# EAGLE board bc (EAGLE 5.05)
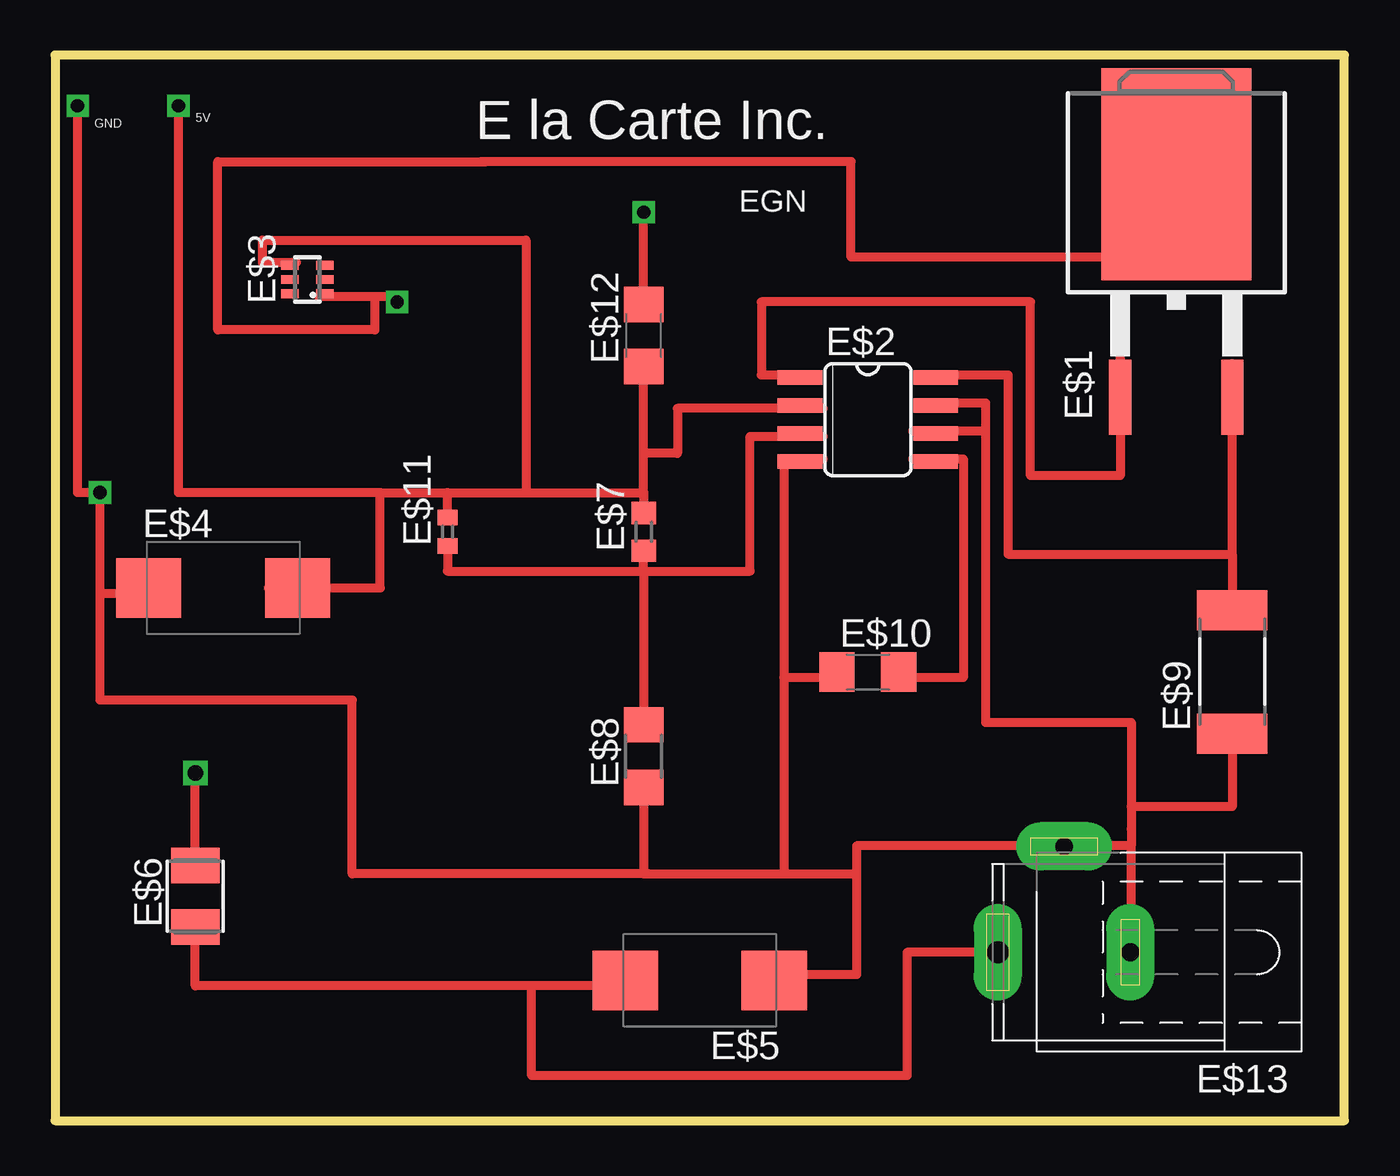
[diagram p0: board, top side]
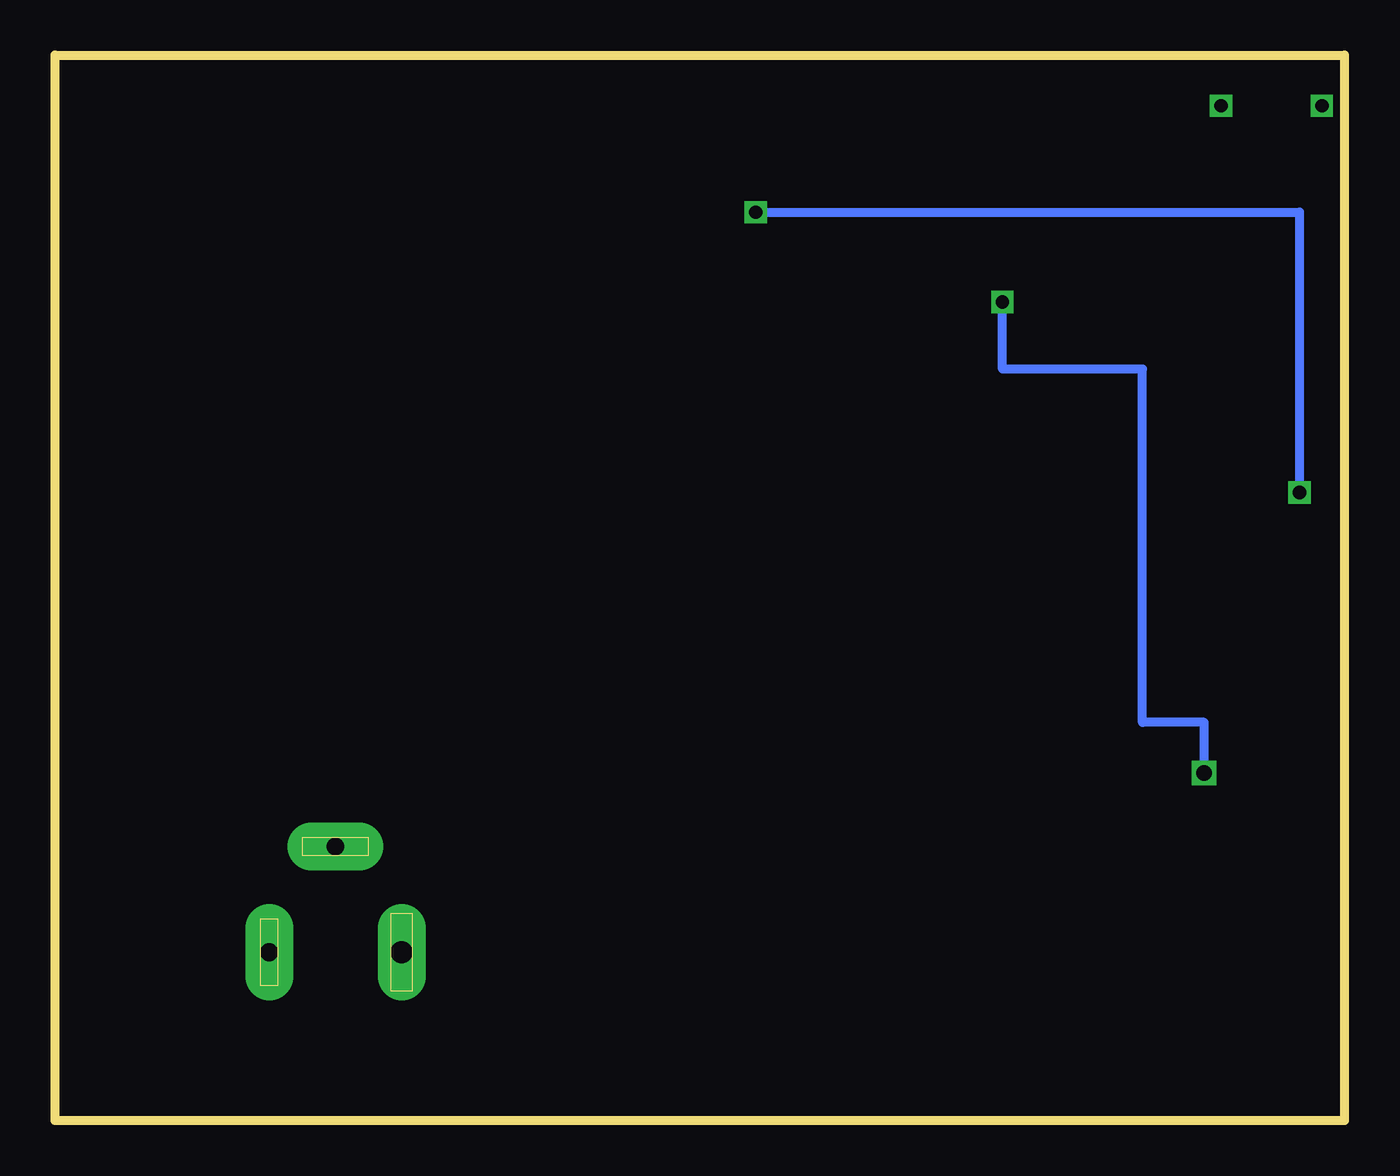
[diagram p1: board, bottom side, seen from below]

Size 58.42 x 48.26 mm. Coordinates in mm from the lower left corner, seen from the top.
Outline: 0,48.26 0,0 58.42,0 58.42,48.26 0,48.26
Copper layers (1*16): Top 0.035mm / dielectric 1.5mm / Bottom 0.035mm
Design rules "default": minimum track width 10mil, minimum drill 24mil, track to track 8mil, track to pad 8mil, pad to pad 8mil, via to via 8mil, smd to smd 8mil, copper to edge 40mil, drill to drill 8mil, minimum pad ring 10mil, minimum via ring 8mil, stop-mask expansion 4mil, vias tented up to drill 0mil, thermal gap 10mil

## Footprints (pad centres in the part's own frame; a part is rotated, then mirrored left to right if it is on the bottom)
TO263 = smd 1 x 3.4: 1 -2.54,-6.6; 2 2.54,-6.6 | smd 6.8 x 9.6: 3 0,3.5
SO08 = smd 0.66 x 2.032: 1 -1.905,-3.073; 2 -0.635,-3.073; 3 0.635,-3.073; 4 1.905,-3.073; 5 1.905,3.073; 6 0.635,3.073; 7 -0.635,3.073; 8 -1.905,3.073
SOT363_PHILIPS = smd 0.4 x 0.8: 1 -0.65,-0.8; 2 0,-0.8; 3 0.65,-0.8; 4 0.65,0.8; 5 0,0.8; 6 -0.65,0.8
D/7343-31W = smd 2.95 x 2.7: + 3.375,0; - -3.375,0
L3225M = smd 1.6 x 2.2: 1 -1.4,0; 2 1.4,0
R0603 = smd 1 x 1.1: 1 -0.85,0; 2 0.85,0
R1206 = smd 1.6 x 1.803: 1 -1.422,0; 2 1.422,0
R2512 = smd 1.8 x 3.2: 1 -2.8,0; 2 2.8,0
C1206 = smd 1.6 x 1.8: 1 -1.4,0; 2 1.4,0
C0402 = smd 0.7 x 0.9: 1 -0.65,0; 2 0.65,0
SPC4077 = drill 0.8 pad 2.184 long: 1 -3,0; 2 0,-4.8 | drill 1 pad 2.184 long: 3 3,0

## Placement (x,y rotation side)
E$1  NDB603AL  [TO263]  50.8,39.37 0 top
E$2  MAX1771  [SO08]  36.83,31.75 270 top
E$3  BAS70-07S  [SOT363_PHILIPS]  11.43,38.1 90 top
E$4  300uF  [D/7343-31W]  7.62,24.13 0 top
E$5  150uF  [D/7343-31W]  29.21,6.35 180 top
E$6  22uH  [L3225M]  6.35,10.16 90 top
E$7  232K  [R0603]  26.67,26.67 90 top
E$8  100K  [R1206]  26.67,16.51 90 top
E$9  0.04  [R2512]  53.34,20.32 90 top
E$10  0.1uF  [C1206]  36.83,20.32 0 top
E$11  100pF  [C0402]  17.78,26.67 90 top
E$12  0.1uF  [C1206]  26.67,35.56 90 top
E$13  [SPC4077]  45.72,7.62 180 top

## Library data of the parts
E$1 = transistor-fet
E$2 = maxim
E$3 = diode
E$4-E$12 = resistor
E$13 = con-jack

## Tracks (layer width: path | path; a pad name or v marks a point on that pad's centre or on a via)
S$1
  Top 0.406: 17.78,26.16 17.78,24.89 26.67,24.89 | 26.67,24.89 26.67,25.91 | 26.67,24.89 26.67,17.53 | 26.67,24.89 31.5,24.89 31.5,30.99 34.8,30.99
S$2  (via drill 0.6)
  other vias: 5.59,45.97
S$3  (via drill 0.6)
  other vias: 1.02,45.97
S$4
  Top 0.406: 6.35,11.18 6.35,16
S$5  (via drill 0.6, 0.7)
  Top 0.406: 11.94,37.34 14.48,37.34 | 14.48,37.34 15.49,37.34 v15.49,37.08 | 14.48,37.34 14.48,35.81 7.37,35.81 7.37,43.43 19.56,43.43 | 50.55,44.2 50.55,39.12 36.07,39.12 36.07,43.43 19.56,43.43 | 19.56,43.43 19.3,43.43
  Bottom 0.406: v6.35,15.75 6.35,18.03 9.14,18.03 9.14,34.04 15.49,34.04 v15.49,37.08 15.49,37.34
S$6
  Top 0.406: 42.93,7.62 38.61,7.62 38.61,2.03 21.59,2.03 21.59,6.1 | 26.16,6.1 21.59,6.1 | 21.59,6.1 6.35,6.1 6.35,9.14
S$8
  Top 0.406: 38.86,29.97 41.15,29.97 41.15,20.07 37.85,20.07
S$9
  Top 0.406: 39.12,33.78 43.18,33.78 43.18,25.65 53.34,25.65 | 53.34,25.65 53.34,22.61 | 53.34,25.65 53.34,34.29
S$10  (via drill 0.6)
  Top 0.406: 38.86,31.24 42.16,31.24 42.16,30.73 | 42.16,30.73 42.16,18.03 48.77,18.03 48.77,13.21 | 53.34,18.03 53.34,14.22 48.77,14.22 48.77,13.21 | 48.77,7.62 48.77,12.45 | 26.67,15.49 26.67,11.18 26.92,11.18 | 26.92,11.18 33.02,11.18 | 33.02,11.18 36.32,11.18 | 36.32,11.18 36.32,6.6 31.75,6.6 | 48.77,12.45 36.32,12.45 36.32,11.18 | 35.81,20.07 33.02,20.07 | 48.77,13.21 48.77,12.45 | 39.12,32.51 42.16,32.51 42.16,30.73 | 34.8,29.97 33.02,29.97 33.02,20.07 | 33.02,20.07 33.02,11.18 | 26.92,11.18 13.46,11.18 13.46,19.05 2.03,19.05 2.03,23.62 | 2.03,23.62 2.03,23.88 5.33,23.88 | 26.67,36.58 v26.67,41.15 | 2.03,23.62 v2.03,28.45 1.02,28.45 1.02,45.72
  Bottom 0.406: v26.67,41.15 2.03,41.15 v2.03,28.45
S$12
  Top 0.406: 48.26,34.54 48.26,29.21 44.2,29.21 44.2,37.08 32,37.08 32,33.78 34.54,33.78
S$14
  Top 0.406: 10.92,38.86 9.4,38.86 9.4,39.88 21.34,39.88 21.34,28.45 | 34.8,32.26 28.19,32.26 28.19,30.23 26.67,30.23 | 9.65,24.13 14.73,24.13 14.73,28.45 | 17.78,27.18 17.78,28.45 | 17.78,28.45 21.34,28.45 | 21.34,28.45 26.67,28.45 | 26.67,28.45 26.67,27.43 | 14.73,28.45 17.78,28.45 | 26.67,28.45 26.67,30.23 | 26.67,30.23 26.67,34.54 | 14.73,28.45 5.59,28.45 5.59,45.72

## Text on the board
tNames: GND | 5V | E la Carte Inc. | EGN